# EAGLE board Venus_GPS_Sma (EAGLE 5.06)
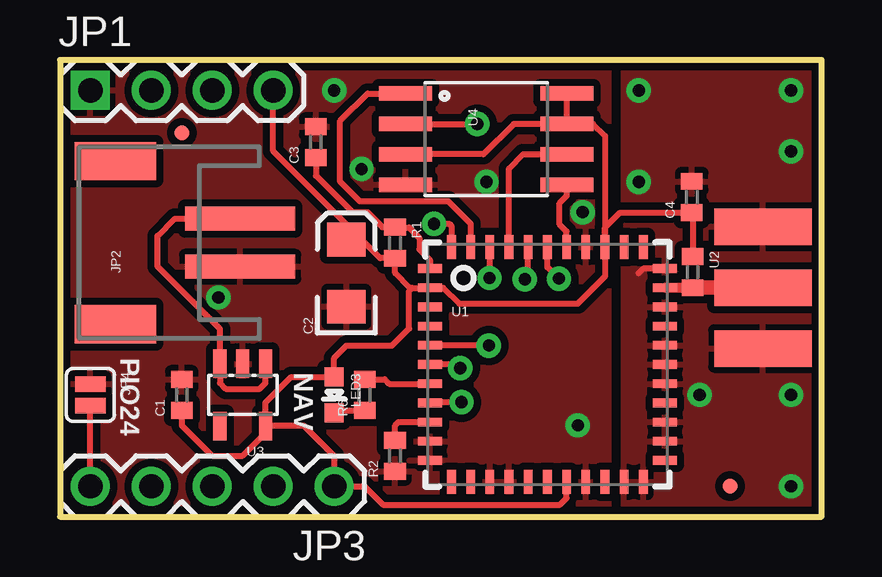
[diagram p0: board, top side]
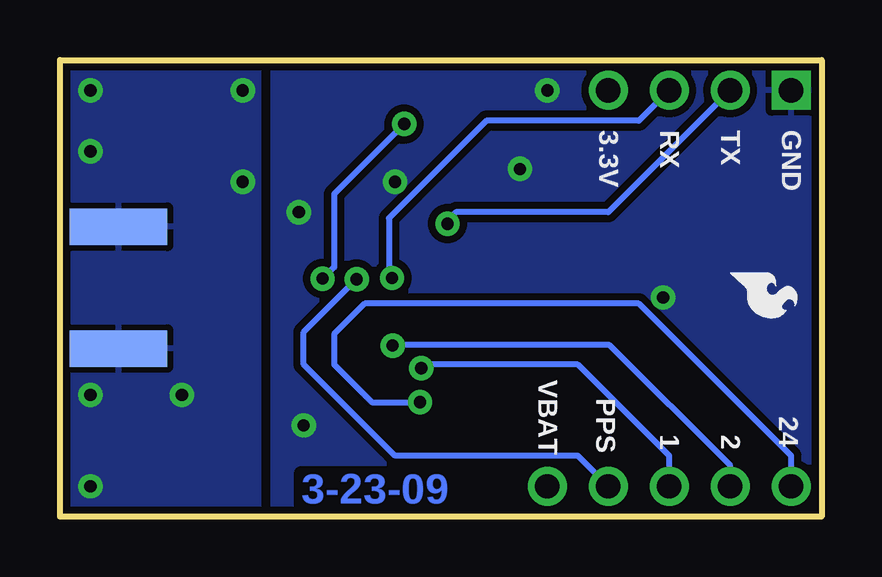
[diagram p1: board, bottom side, seen from below]

Size 31.75 x 19.05 mm. Coordinates in mm from the lower left corner, seen from the top.
Outline: 0,0 31.75,0 31.75,19.05 0,19.05 0,0
Copper layers (1*16): Top 0.0356mm / dielectric 1.5011mm / Bottom 0.0356mm
Design rules "default": minimum track width 8mil, minimum drill 20mil, track to track 8mil, track to pad 8mil, pad to pad 8mil, via to via 8mil, smd to smd 8mil, copper to edge 10mil, drill to drill 8mil, minimum pad ring 12mil, minimum via ring 10mil, stop-mask expansion 4mil, vias tented up to drill 20mil, thermal gap 10mil

## Footprints (pad centres in the part's own frame; a part is rotated, then mirrored left to right if it is on the bottom)
C0402 = smd 0.7 x 0.9: 1 -0.65,0; 2 0.65,0
EIA3216 = smd 1.4 x 1.6: A 1.4,0; C -1.4,0
SMA-EDGE = smd 1.524 x 4.064: GND@0 0,0; GND@1 5.08,0; SIG 2.54,0 | smd 1.524 x 4.064 bottom: GND@2 0,0; GND@3 5.08,0
1X04 = drill 1.016 square: 1 0,0 | drill 1.016 round: 2 2.54,0; 3 5.08,0; 4 7.62,0
S2B-PH = smd 1 x 4.6: 1 -1,-3.7; 2 1,-3.7 | smd 1.6 x 3.4: NC1 -3.4,1.5; NC2 3.4,1.5
1X05 = drill 1.016 round: 1 0,0; 2 2.54,0; 3 5.08,0; 4 7.62,0; 5 10.16,0
SJ_2S = smd 0.635 x 1.27: 1 -0.45,0; 2 0.45,0
FIDUCIAL-1X2.5 = smd 0.635 x 0.635: 1 0,0
LED-0603 = smd 0.8 x 0.8: A 0,-0.75; C 0,0.75
LGA44 = smd 1 x 0.36: 1 -4.9,4; 2 -4.9,3.2; 3 -4.9,2.4; 4 -4.9,1.6; 5 -4.9,0.8; 6 -4.9,0; 7 -4.9,-0.8; 8 -4.9,-1.6; 9 -4.9,-2.4; 10 -4.9,-3.2; 11 -4.9,-4; 23 4.9,-4; 24 4.9,-3.2; 25 4.9,-2.4; 26 4.9,-1.6; 27 4.9,-0.8; 28 4.9,0; 29 4.9,0.8; 30 4.9,1.6; 31 4.9,2.4; 32 4.9,3.2; 33 4.9,4 | smd 0.36 x 1: 12 -4,-4.9; 13 -3.2,-4.9; 14 -2.4,-4.9; 15 -1.6,-4.9; 16 -0.8,-4.9; 17 0,-4.9; 18 0.8,-4.9; 19 1.6,-4.9; 20 2.4,-4.9; 21 3.2,-4.9; 22 4,-4.9; 34 4,4.9; 35 3.2,4.9; 36 2.4,4.9; 37 1.6,4.9; 38 0.8,4.9; 39 0,4.9; 40 -0.8,4.9; 41 -1.6,4.9; 42 -2.4,4.9; 43 -3.2,4.9; 44 -4,4.9
SOT23-5 = smd 0.55 x 1.2: 1 -0.95,-1.3; 2 0,-1.3; 3 0.95,-1.3; 4 0.95,1.3; 5 -0.95,1.3
SO08-EIAJ = smd 0.61 x 2.21: 1 -1.905,-3.378; 2 -0.635,-3.378; 3 0.635,-3.378; 4 1.905,-3.378; 5 1.905,3.353; 6 0.635,3.353; 7 -0.635,3.353; 8 -1.905,3.353

## Placement (x,y rotation side)
C1  0.1uF  [C0402]  5.08,5.08 90 top
C2  10uF  [EIA3216]  11.94,10.16 90 top
C3  1uF  [C0402]  10.67,15.62 90 top
C4  22pF  [C0402]  26.34,13.34 90 top
J$1  SMA_EDGE  [SMA-EDGE]  29.31,7.01 90 top
JP1  UART  [1X04]  1.27,17.78 0 top
JP2  Battery  [S2B-PH]  3.81,11.43 90 top
JP3  General  [1X05]  11.43,1.27 180 top
JP4  Low Power Mode  [SJ_2S]  1.27,5.08 270 top
JP5  FIDUCIAL1X2.5  [FIDUCIAL-1X2.5]  27.94,1.27 0 top
JP6  FIDUCIAL1X2.5  [FIDUCIAL-1X2.5]  5.08,16 0 top
LED3  Green  [LED-0603]  11.43,5.08 180 top
R1  33k  [C0402]  13.97,11.43 270 top
R2  10k  [C0402]  13.97,2.54 90 top
R6  330  [C0402]  12.7,5.08 90 top
U1  VENUS634SMD  [LGA44]  20.32,6.35 0 top
U2  33nH  [C0402]  26.38,10.2 270 top
U3  V_REG_LDOSMD  [SOT23-5]  7.62,5.08 180 top
U4  SPI_FLASH-X25XXSMD1  [SO08-EIAJ]  17.78,15.75 270 top
U$1  LOGO-SFESK  [SFE-LOGO-FLAME]  3.81,10.16 270 bottom

## Library data of the parts
C1-C4 J$1 JP1-JP4 LED3 R1 R2 R6 U1-U4 U$1 = SparkFun
JP5 JP6 = abes

## Nets
3.3V: C1.1 C2.A C4.1 JP1.4 JP3.1 LED3.A R1.2 U1.2 U1.18 U1.36 U2.1 U3.5 U4.3 U4.7 U4.8
BTSEL: R2.2 U1.9
CLK: U1.41 U4.6
CS: U1.43 U4.1
GND: C1.2 C2.C C3.2 JP1.1 JP2.1 JP4.1 R2.1 U1.10 U1.11 U1.14 U1.15 U1.19 U1.37 U3.2 U4.4
GPIO1: JP3.3 U1.6
GPIO2: JP3.4 U1.5
GPIO24: JP3.5 JP4.2 U1.8
MISO: U1.39 U4.2
MOSI: U1.38 U4.5
N$1: LED3.C R6.1
N$3: C3.1 R1.1 U1.1
N$14: J$1.SIG U1.32 U2.2
NAV: R6.2 U1.7
PPS: JP3.2 U1.40
RFGND: C4.2 J$1.GND@0 J$1.GND@1 J$1.GND@2 J$1.GND@3 U1.21 U1.22 U1.24 U1.25 U1.27 U1.28 U1.29 U1.31 U1.33
RX: JP1.3 U1.42
TX: JP1.2 U1.44
VBATT: JP2.2 U3.1 U3.3

## Tracks (layer width: path | path; a pad name or v marks a point on that pad's centre or on a via)
3.3V
  Top 0.254: 22.72,11.81 U1.36 22.73,11.24 22.73,10.03 21.59,8.89 16.64,8.89 15.98,9.55 U1.2 14.68,9.55 | 22.72,11.81 22.72,12.05 | 22.72,12.05 23.35,12.69 C4.1 26.38,12.65 U2.1 | 22.72,12.05 22.73,12.06 | 14.68,9.55 14.58,9.55 13.97,10.16 R1.2 13.35,10.78 12.7,11.43 12.07,11.43 C2.A 11.94,12.19 8.89,15.24 JP1.4 | 22.72,11.81 22.73,11.82 22.73,15.88 22.23,16.38 U4.7 | U4.3 17.65,15.11 18.92,16.38 U4.7 | U4.7 U4.8 | 14.68,9.55 14.55,9.42 14.55,7.85 13.84,7.14 11.94,7.14 11.43,6.63 LED3.A 9.64,5.83 8.57,4.76 U3.5 | C1.1 5.08,3.81 6.35,2.54 7.62,2.54 8.57,3.49 U3.5 | U1.18 21.12,0.78 20.85,0.51 13.46,0.51 12.7,1.27 JP3.1 11.43,2.54 10.16,3.81 8.6,3.81 U3.5
BTSEL
  Top 0.254: U1.9 14.11,3.95 13.97,3.81 R2.2
CLK
  Top 0.254: U1.41 18.72,14.53 19.3,15.11 U4.6
CS
  Top 0.254: U1.43 17.12,12.22 16.18,13.16 12.5,13.16 11.68,13.97 11.68,16.51 12.83,17.65 U4.1
GND  (via drill 0.51)
  other vias: 17.78,13.97 21.79,12.7 11.43,17.78 21.59,3.81 12.57,14.5 6.6,9.14
  pour Bottom (isolate 0.305): 0,19.05 22.86,19.05 22.86,0 0,0
  pour Top (isolate 0.305): 0,19.05 22.86,19.05 22.86,0 0,0
GPIO1  (via drill 0.51)
  Top 0.254: U1.6 16.66,6.35 v16.69,6.2
  Bottom 0.254: JP3.3 6.35,2.54 10.16,6.35 16.66,6.35 v16.69,6.2
GPIO2  (via drill 0.51)
  Top 0.254: U1.5 v17.87,7.15 v17.88,7.14
  Bottom 0.254: JP3.4 3.81,2.13 8.84,7.16 17.86,7.16 v17.88,7.14 17.86,7.11
GPIO24  (via drill 0.51)
  Top 0.254: v16.74,4.78 15.45,4.78 U1.8 | JP3.5 JP4.2
  Bottom 0.254: v16.74,4.78 18.75,4.78 20.32,6.35 20.32,7.62 19.05,8.89 7.62,8.89 1.27,2.54 JP3.5
MISO  (via drill 0.51)
  Top 0.254: U4.2 v17.4,16.38 | U1.39 20.32,10.41 v20.8,9.93
  Bottom 0.254: v17.4,16.38 20.32,13.46 20.32,10.41 v20.8,9.93
MOSI
  Top 0.254: U1.38 21.12,11.9 20.83,12.19 20.83,13.08 21.13,13.39 U4.5
N$1
  Top 0.254: R6.1 11.53,4.43 LED3.C
N$3
  Top 0.254: U1.1 15.42,10.72 14.99,11.15 14.99,11.63 14.55,12.06 13.98,12.06 R1.1 13.45,12.08 12.83,12.7 12.19,12.7 10.67,14.22 C3.1
N$14
  Top 0.254: U2.2 | U1.32
  Top 0.406: U1.32 U2.2
  Top 0.61: U2.2 J$1.SIG
NAV
  Top 0.254: U1.7 13.73,5.55 13.55,5.73 R6.2
PPS  (via drill 0.51)
  Top 0.254: U1.40 19.52,10.05 v19.38,9.91
  Bottom 0.254: JP3.2 10.16,2.54 17.78,2.54 21.59,6.35 21.59,7.7 v19.38,9.91
RFGND  (via drill 0.51)
  Top 0.254: U1.33 24.32,10.35 24.13,10.16
  other vias: 24.13,17.78 30.48,15.24 30.48,1.27 30.48,17.78 24.13,13.97 26.67,5.08 30.48,5.08
  pour Top (isolate 0.305): 23.5,19.05 23.5,0 31.75,0 31.75,19.05
  pour Bottom (isolate 0.305): 23.5,19.05 23.5,0 31.75,0 31.75,19.05
RX  (via drill 0.51)
  Top 0.254: U1.42 17.92,10.1 v17.91,9.96
  Bottom 0.254: JP1.3 7.62,16.51 13.97,16.51 18.03,12.45 18.03,9.98 v17.91,9.96
TX  (via drill 0.51)
  Top 0.254: U1.44 16.32,12.13 16.23,12.22 v15.6,12.22
  Bottom 0.254: JP1.2 8.89,12.7 15.24,12.7 15.6,12.34 v15.6,12.22
VBATT
  Top 0.254: U3.1 8.57,5.57 8.33,5.33 6.91,5.33 6.67,5.57 U3.3 6.67,7.83 4.06,10.44 4.06,11.71 4.79,12.43 JP2.2

## Text on the board
Bottom: 3-23-09
tPlace: PIO24 | NAV
bPlace: GND | TX | RX | 3.3V | VBAT | PPS | 24 | 2 | 1